# Altium PCB Proto Recepteur.PcbDoc
Units mil, origin at the board's own origin, x right, y up, seen from the top; angles counter-clockwise.
Board outline 1190 x 2860 mil, 2 copper layers (Top Layer, Bottom Layer); 28 components, 15 nets, 72 pads, 40 vias.
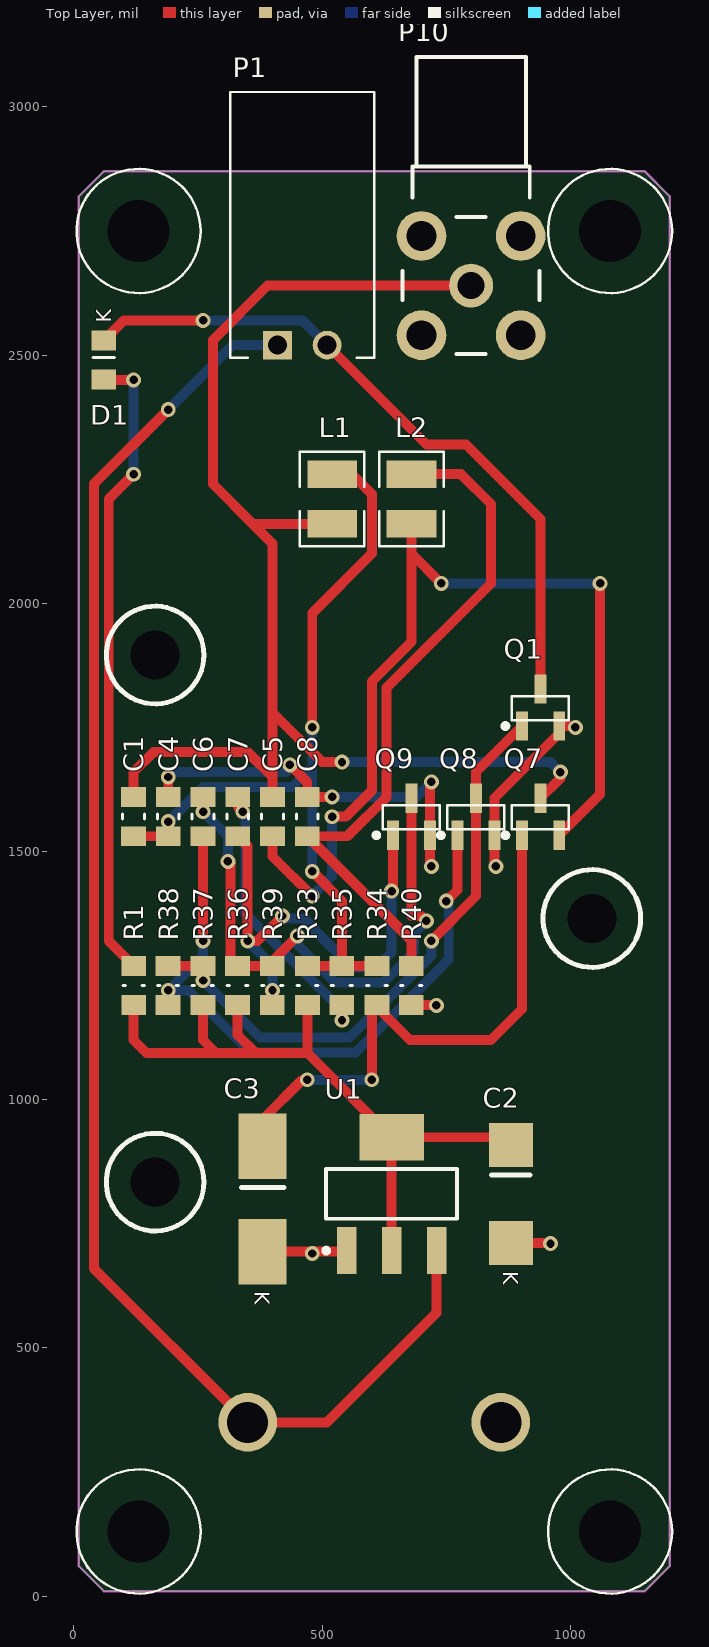
[diagram p0: Top Layer view]
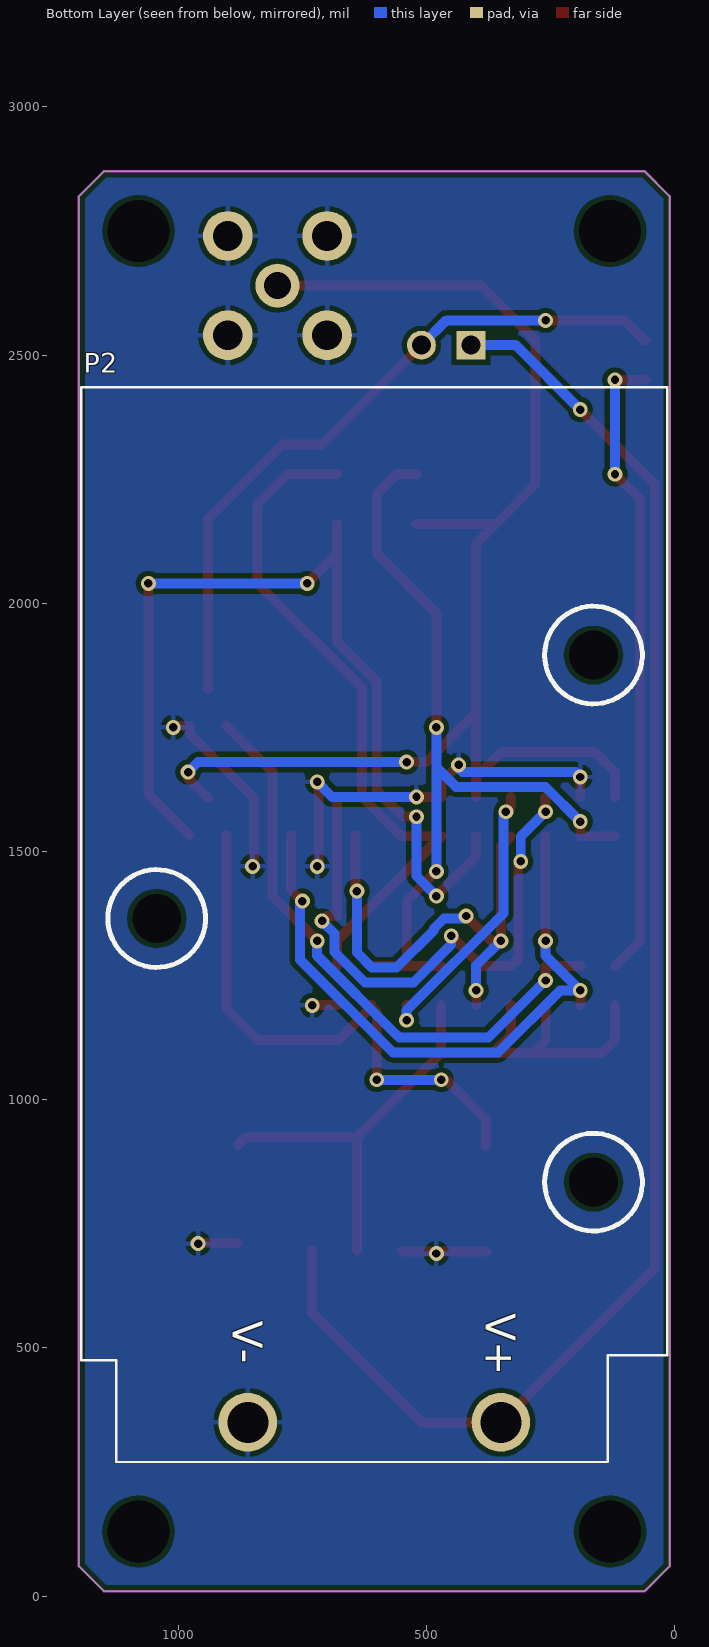
[diagram p1: Bottom Layer view, seen from below]
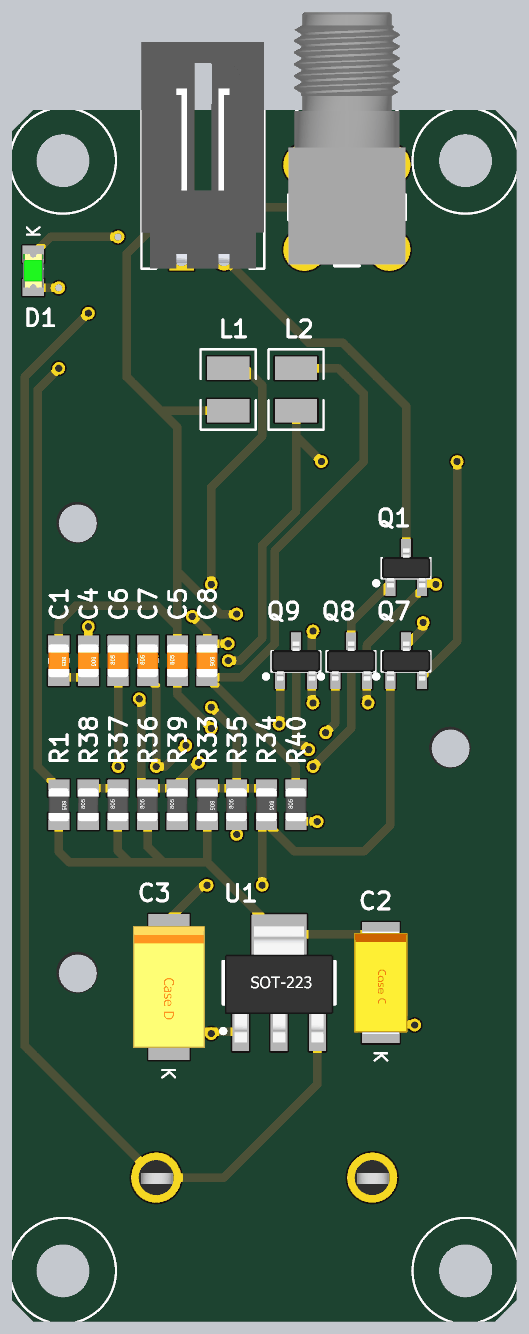
[diagram p2: 3D render of the assembled board from above, using the file's embedded part models]

## Layer stack, top to bottom
Top Layer: signal copper 1.4
Dielectric: dielectric 12.6, FR-4, Dk 4.8
Bottom Layer: signal copper 1.4

## Board outline
10,60 10,2820 60,2870 1150,2870 1200,2820 1200,60 1150,10 60,10

## Design rules (kind name [scope] priority, off if disabled: settings)
Clearance [All] p1: gap=10
HoleSize [All] p1: absolutevalues=TRUE maxlimit=125 minlimit=1 maxpercent=80.000 minpercent=20.000
MinimumSolderMaskSliver [All] p1 off: minsoldermaskwidth=10
PolygonConnect [All] p1: connectstyle=Relief reliefconductorwidth=10 reliefentries=4 polygonreliefangle="90 Angle"
RoutingVias [All] p1: holewidth=17 width=30 viastyle="Through Hole" minholewidth=17 minwidth=30 maxholewidth=28 maxwidth=50
SilkscreenOverComponentPads [All] p1 off: minsilkscreentomaskgap=10
SolderMaskExpansion [All] p1: expansion=4
Width [All] p1: maxlimit=20 minlimit=10 preferedwidth=20
25 further rules are at their usual default settings.

## Components (designator, comment, footprint, x,y, rotation, side; value= is the part's Value field where it differs from the comment)
C1 "Cap" "0805 - Cap Non-Polarized" 120,1570 r270 top
C2 "Cap Tantal" "Tantalum - Case C" 880,810 r270 top
C3 "Cap Tantal" "Tantalum - Case D" 380,800 r270 top
C4 "Cap" "0805 - Cap Non-Polarized" 190,1570 r270 top
C5 "Cap" "0805 - Cap Non-Polarized" 400,1570 r90 top
C6 "Cap" "0805 - Cap Non-Polarized" 260,1570 r90 top
C7 "Cap" "0805 - Cap Non-Polarized" 330,1570 r90 top
C8 "Cap" "0805 - Cap Non-Polarized" 470,1570 r270 top
D1 "Green" "0805 - Led Green" 60,2490 r90 top
L1 "Inductor" "1008 - INDUCTOR" 520,2210 r90 top
L2 "Inductor" "1008 - INDUCTOR" 680,2210 r90 top
P1 "Header 1X2" "Headers - 1x2 - R/A - Lock" 410,2520 r0 top
P2 "Battery Holder" "Battery Holder - 9V - THT" 350,350 r270 bottom locked
P10 "Coax-F" SMA-Female-R/A-THT 800,2640 r270 top
Q1 "MOSFET_N" SOT23-3 940,1790 r90 top
Q7 "NPN" SOT23-3 940,1570 r90 top
Q8 "NPN" SOT23-3 810,1570 r90 top
Q9 "NPN" SOT23-3 680,1570 r90 top
R1 "Res" "0805 - Resistor" 120,1230 r270 top
R33 "Res" "0805 - Resistor" 470,1230 r270 top
R34 "Res" "0805 - Resistor" 610,1230 r270 top
R35 "Res" "0805 - Resistor" 540,1230 r90 top
R36 "Res" "0805 - Resistor" 330,1230 r90 top
R37 "Res" "0805 - Resistor" 260,1230 r90 top
R38 "Res" "0805 - Resistor" 190,1230 r90 top
R39 "Res" "0805 - Resistor" 400,1230 r90 top
R40 "Res" "0805 - Resistor" 680,1230 r90 top
U1 "LM1117" SOT223-3 640,810 r90 top

## Footprints (in the part's own frame and the unit in brackets; to place one, negate y for a bottom-side part, rotate by r counter-clockwise, add the part's x,y. Pads: shape width x height; smd on the part's side, far side on the other; paste and mask are expansions set on the pad)
"0805 - Cap Non-Polarized" [mil]
  rect 40x50 smd: 1(-39.38,-0.01) 2(39.36,-0.01)
  silkscreen extent -5,-22 5,22, body extent -39,-25 39,25, height 31
"0805 - Led Green" [mil]
  rect 40x50 smd: 1(-39.37,0) 2(39.37,0)
  silkscreen extent 5,-22 5,22, body extent -40,-25 40,25, height 43
"0805 - Resistor" [mil]
  rect 40x50 smd: 1(-39.38,0.39) 2(39.36,0.39)
  silkscreen extent 0,-21 0,22, body extent -39,-24 39,25, height 31
"1008 - INDUCTOR" [mil]
  rect 55x100 smd: 1(-50,0) 2(50,0)
  silkscreen extent -95,-65 95,65, body extent -49,-39 49,39, height 71
"Battery Holder - 9V - THT" [mm]
  round 3 hole 2.1: 1(0,0) 2(0,-12.95)
  round 2 hole 2.5 unplated: ""(-39.26,4.74) ""(-25.78,-17.61) ""(-12.29,4.74)
  Bottom Overlay keep-out circle w0.254: c-25.78,-17.61 r2.5
  Bottom Overlay keep-out circle w0.254: c-12.29,4.74 r2.5
  Bottom Overlay keep-out circle w0.254: c-39.26,4.74 r2.5
  silkscreen extent -52.96,-21.46 2.03,8.51, body extent -52.96,-21.46 2.03,8.51, height 21.31
"Headers - 1x2 - R/A - Lock" [mil]
  rect 58x58 hole 38: 1(0,0)
  round 58 hole 38: 2(100,0)
  silkscreen extent -95,-25 195,510, body extent -95,-25 195,510, height 280
SMA-Female-R/A-THT [mil]
  round 88.58 hole 55: 1(0,0)
  round 100 hole 60: 2(-100,-100) 3(-100,100) 4(100,100) 5(100,-100)
  silkscreen extent -461,-138 138,138, body extent -459,-138 135,138, height 388
SOT23-3 [mm]
  rect 1.5x0.6 smd: 1(-0.95,0.95) 2(-0.95,-0.95) 3(0.95,0)
  silkscreen extent -1.07,-1.45 0.58,1.92, body extent -1.19,-1.46 1.15,1.46, height 1
SOT223-3 [mm]
  rect 2.4x1 smd: 1(-2.9,2.3) 2(-2.9,0) 3(-2.9,-2.3)
  rect 2.4x3.3 smd: 2(2.9,0)
  silkscreen extent -3.02,-3.35 1.27,3.47, body extent -3.58,-3.25 3.38,3.25, height 1.65
"Tantalum - Case C" [mm]
  rect 2.25x2.25 smd: 1(-2.5,0) 2(2.5,0)
  silkscreen extent -0.97,-0.99 -0.97,0.99, body extent -3.09,-1.6 3.09,1.61, height 2.72
"Tantalum - Case D" [mm]
  rect 3.35x2.45 smd: 1(-2.7,0) 2(2.7,0)
  silkscreen extent -0.58,-1.09 -0.58,1.09, body extent -3.65,-2.15 3.65,2.15, height 2.8

## Part data
C1: library part Cap-TDK-CGA-47pF-0805, "CAP CER 47PF 100V 5% NP0 0603"
C2: library part "Kemet-T491-100uF-16V-1 Ohm", "CAP TANT 100 16V 10% 2413"
C3: library part "Kemet-T491-4.7uF-35V-1.5 Ohm", "CAP TANT 4.7 35V 10% 2917"
C4 C6 C7: library part Cap-TDK-CGA-0.1uF-0805, "CAP CER 0.1UF 100V 10% X7R 0805"
C5: library part Cap-TDK-CGA-27pF-0805, "CAP CER 27PF 50V 5% NP0 0603"
C8: library part Cap-TDK-CGA-2200pF-0805, "CAP CER 2200PF 100V 5% NP0 0805"
D1: library part LED-Green-lowBrigthness-0805, "Led Green 0805 Low Brightness - 10mA"
L1: library part Murata-LQW2UA-Ind-AirCore-750nH, "IND 750NH 360MA SRF 360MHZ 1008"
L2: library part Murata-LQW2UA-Ind-AirCore-1uH, "IND 1000NH 370MA SRF 290MHZ 1008"
P1: library part Header-0.100-R/A-Lock-1X2
P2: library part "Battery Holder-9V-THT-Open", "HOLDER BATTERY 9V PC MOUNT"
P10: library part coax-sma-ra-tht, "CONN SMA JACK R/A 50 OHM PCB"
Q1: library part 2N7002, "MosFET Channel-N SOT-23-3 3.3A"
Q7 Q8 Q9: library part MMBT2222A-7-F, "TRANS NPN 40V 350MW SMD SOT23-3"
R1: library part Yagao-RC0805-300, "RES 300 OHM 1/8W 5% 0805 SMD"
R33: library part Yagao-RC0805-4.3k, "RES 4.3K OHM 1/8W 5% 0805 SMD"
R34 R35: library part Yagao-RC0805-180k, "RES 180K OHM 1/8W 5% 0805 SMD"
R36 R37: library part Yagao-RC0805-100k, "RES 100K OHM 1/8W 5% 0805 SMD"
R38 R39: library part Yagao-RC0805-2.2M, "RES 2.2M OHM 1/8W 5% 0805 SMD"
R40: library part Yagao-RC0805-560, "RES 560 OHM 1/8W 5% 0805 SMD"
U1: library part "LM1117 5v SOT223-3", "Regulator LDO 5V"

## Free pads (board coordinates)
  round 0 hole 125 unplated: MH(130,130) MH(130,2750) MH(1080,130) MH(1080,2750)

## Via types
v1: diameter 30, hole 17, Top Layer to Bottom Layer, 40 vias

## Nets (pads, with @x,y where several pads share a name; then routed paths per layer and width w, separated by ;. In a path a pad name is that pad's centre, name@x,y a point inside that pad or via, vN(x,y) a via of type N, cw(c..) or ccw(c..) an arc to the next point about the centre after c; other vN are vias at no path point)
5V: C2.1 R1.2 R33.2 R36.1 R37.1 U1.2 | length 1463.5
  Top Layer w20: R1.2 120,1190.25 120,1120 146.21,1093.79 286.21,1093.79 ; R37.1 259.61,1120.39 286.21,1093.79 ; R36.1 329.61,1130.39 366.21,1093.79 ; R33.2 470.39,1093.79 ; U1.2@640,695.83 U1.2@640,924.17 ; C2.1 864.25,924.17 U1.2@640,924.17 ; 286.21,1093.79 366.21,1093.79 ; 366.21,1093.79 470.39,1093.79 ; 470.39,1093.79 U1.2@640,924.17
COM: C2.2 C3.2 C4.1 C8.1 P2.2 P10.2 P10.3 P10.4 P10.5 Q1.2 Q8.2 Q9.2 R40.1 U1.1 | length 1490.9
  Top Layer w20: C4.1 v1(190,1650) ; C3.2 v1@480,693.7 ; v1(435.01,1674.5) 469.99,1639.52 C8.1 519.38,1609.38 v1(520,1610) ; v1(480,690) v1@480,693.7 ; U1.1 547.32,693.7 v1@480,693.7 ; R40.1 729.38,1190.62 v1(730,1190) ; v1(720,1470) 717.4,1472.6 Q9.2 717.4,1637.4 v1(720,1640) ; v1(850,1470) 847.4,1472.6 Q8.2 847.4,1607.4 977.4,1737.4 Q1.2 1007.4,1752.6 v1(1010,1750) ; C2.2 958.43,711.57 v1(960,710)
  Bottom Layer w20: v1(190,1650) 200,1660 427.57,1660 435.01,1667.43 v1(435.01,1674.5) ; v1(520,1610) 690,1610 v1(720,1640)
NetC1_1: C1.1 C5.2 L1.1 P10.1 Q7.3 | length 2762.7
  Top Layer w20: C1.1 119.99,1659.99 160,1700 350,1700 400.01,1649.99 ; C5.2 400.01,1649.99 ; L1.1 360,2160 ; v1(540,1680) 500.01,1680 400.01,1780 ; P10.1 390,2640 280,2530 280,2240 360,2160 ; Q7.3 980,1647.4 v1(980,1660) ; 360,2160 400.01,2119.99 400.01,1780 ; 400.01,1649.99 400.01,1780
  Bottom Layer w20: v1(540,1680) 960,1680 v1(980,1660)
NetC1_2: C1.2 C4.2 L1.2 R33.1 R34.1 R35.2 | length 1696.5
  Top Layer w20: C1.2 C4.2 v1(190,1560) ; R33.1 R35.2 ; v1(480,1460) 539.61,1400.39 R35.2 ; v1(480,1750) 480,1980 600,2100 600,2220 560,2260 L1.2 ; R34.1 R35.2
  Bottom Layer w20: v1(190,1560) 260,1630 440,1630 480,1670 ; v1(480,1460) 480,1670 ; v1(480,1750) 480,1670
NetC3_1: C3.1 Q7.1 R34.2 | length 1157.5
  Top Layer w20: C3.1 380,960 460,1040 v1(470,1040) ; v1(600,1040) 600,1176.18 R34.2@610.39,1186.56 ; R34.2 R34.2@610.39,1186.56 ; Q7.1 902.6,1182.6 840,1120 676.95,1120 R34.2@610.39,1186.56
  Bottom Layer w20: v1(470,1040) v1(600,1040)
NetC5_1: C5.1 L2.1 Q7.2 | length 1949.2
  Top Layer w20: C5.1 400.01,1489.99 v1(480,1410) ; v1(520,1570) 547.57,1570 600,1622.43 600,1842.43 680,1922.43 680,2100 ; L2.1 680,2100 ; v1(740,2040) 680,2100 ; Q7.2 1060,1615.2 v1(1060,2040)
  Bottom Layer w20: v1(480,1410) 480,1410.5 520,1450.5 v1(520,1570) ; v1(740,2040) v1(1060,2040)
NetC6_1: C6.1 Q8.1 R38.1 | length 1325.1
  Top Layer w20: R38.1 189.61,1219.61 v1(190,1220) ; v1(260,1320) C6.1 ; v1(750,1400) 772.6,1422.6 Q8.1
  Bottom Layer w20: v1(260,1320) 260,1290 v1(190,1220) 230.5,1220 355.5,1095 567.43,1095 755,1282.57 755,1395 v1(750,1400)
NetC6_2: C6.2 Q9.3 R36.2 R39.2 | length 1174.3
  Top Layer w20: v1(260,1580) C6.2 ; v1(310,1480) 315,1475 315,1283.98 R36.2 R39.2 399.61,1279.61 v1(450,1330) ; Q9.3 680,1370 700,1370 v1(710,1360)
  Bottom Layer w20: v1(260,1580) 310,1530 v1(310,1480) ; v1(450,1330) 450,1312.43 526.21,1236.21 623.79,1236.21 685,1297.43 685,1334.5 710,1359.5 v1(710,1360)
NetC7_1: C7.1 Q9.1 R39.1 | length 974.7
  Top Layer w20: C7.1 350,1510.63 v1(350,1320) 370,1320 v1(420,1370) ; R39.1 399.61,1219.61 v1(400,1220) ; v1(640,1420) 642.6,1422.6 Q9.1
  Bottom Layer w20: v1(350,1320) 400,1270 v1(400,1220) ; v1(420,1370) 425,1365 464.5,1365 485,1344.5 485,1341.21 560,1266.21 610,1266.21 640,1296.21 v1(640,1420)
NetC7_2: C7.2 R35.1 | length 567.1
  Top Layer w20: C7.2 330.01,1589.99 v1(340,1580) ; R35.1 540,1190.24 v1(540,1160)
  Bottom Layer w20: v1(340,1580) 345,1575 345,1375 540,1180 v1(540,1160)
NetC8_2: C8.2 L2.2 R40.2 | length 1402.8
  Top Layer w20: R40.2 679.61,1321.02 C8.2 550.64,1530.64 630,1610 630,1830 840,2040 840,2200 780,2260 L2.2
NetD1_1: D1.1 R1.1 | length 1282.5
  Top Layer w20: D1.1 60.63,2450 v1(120,2450) ; v1(120,2260) 70,2210 70,1319.76 R1.1
  Bottom Layer w20: v1(120,2260) v1(120,2450)
NetD1_2: D1.2 P1.2 Q1.3 | length 1405.1
  Top Layer w20: D1.2 100.63,2570 v1(260,2570) ; P1.2 710,2320 790,2320 940,2170 Q1.3
  Bottom Layer w20: v1(260,2570) 460,2570 P1.2
NetQ1_1: Q1.1 Q8.3 R37.2 R38.2 | length 1213.7
  Top Layer w20: R38.2 R37.2 260,1268.98 v1(260,1240) ; v1(720,1320) 810,1410 Q8.3 810,1660 Q1.1
  Bottom Layer w20: v1(260,1240) 375,1125 554.5,1125 559.5,1130 560,1130 720,1290 v1(720,1320)
VBATT: P1.1 P2.1 U1.3 | length 3101.6
  Top Layer w20: v1(190,2390) 40,2240 40,660 P2.1 510,350 730.55,570.55 U1.3
  Bottom Layer w20: v1(190,2390) 320,2520 P1.1
pads on no net: P2.

## Polygon pours and split planes (outlines as drawn)
COM on Bottom Layer "GND Plane" (solid, pour order 2): 60,2870 10,2820 10,60 60,10 1150,10 1200,60 1200,2820 1150,2870 60,2870

## Keep-outs
Keep-Out Layer:
  the board outline again, w5

## Silkscreen, mask and mechanical layers (free items; w line width, h text height)
Top Overlay:
  circle w5: c130,2750 r125
  circle w5: c1080,2750 r125
  circle w5: c1080,130 r125
  circle w5: c130,130 r125

## Text inside footprints (layer, text, board x,y; h text height)
C2: Top Overlay "K" at 865,654 h30 r270
C3: Top Overlay "K" at 364,614 h30 r270
D1: Top Overlay "K" at 75,2565 h30 r90
P2: Bottom Overlay "V-" at 890,555 h60 r90; Bottom Overlay "V+" at 380,570 h60 r90